# Altium PCB TouchButtons.PcbDoc
Units mm, origin at the board's own origin, x right, y up, seen from the top; angles counter-clockwise.
Board outline 160 x 30 mm, 2 copper layers (Component Side, Solder Side), stack 1.57 mm thick; 5 components, 6 nets, 15 pads, 0 vias.
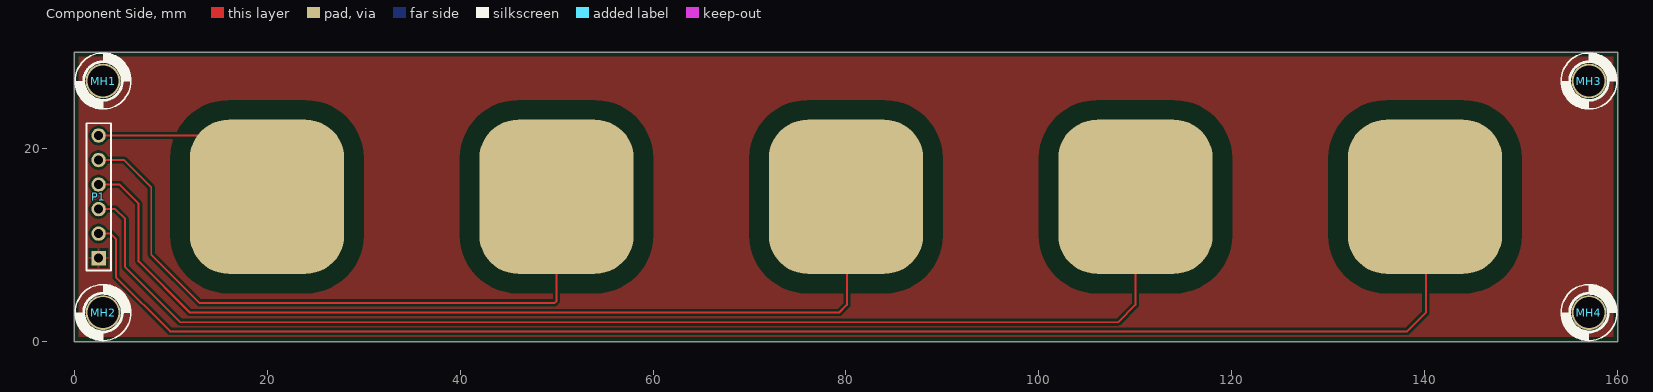
[diagram p0: Component Side view]
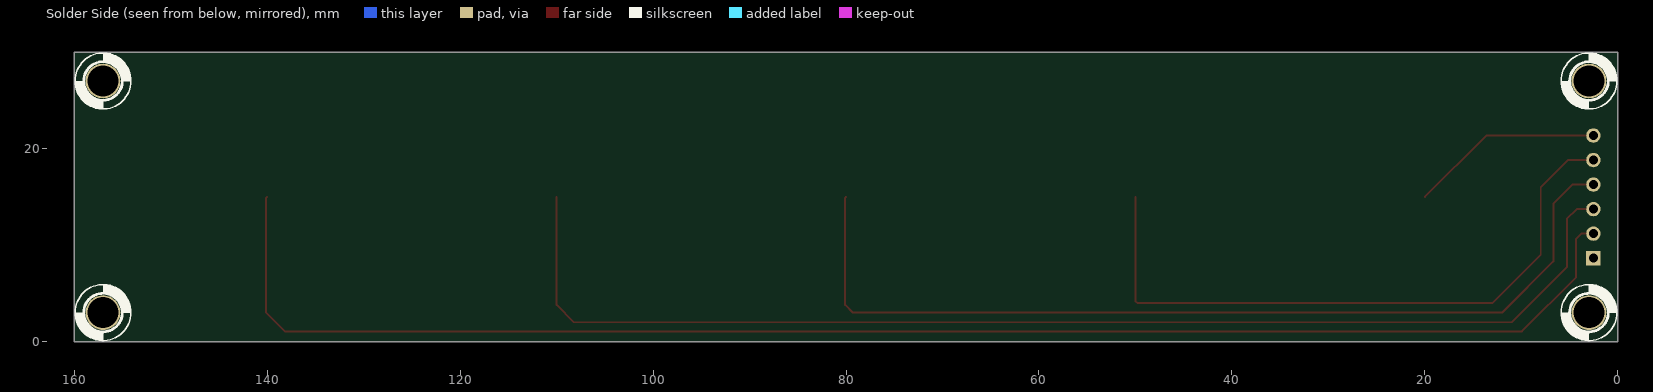
[diagram p1: Solder Side view, seen from below]

## Layer stack, top to bottom
Top Solder: solder mask 0.0102, Solder Resist, Dk 3.5
Component Side: signal copper 0.035
Dielectric 3: prepreg 1.5, Dk 4.2
Solder Side: signal copper 0.035
Bottom Solder: solder mask 0.0102, Solder Resist, Dk 3.5

## Board outline
0,0 0,30 160,30 160,0

## Design rules (kind name [scope] priority, off if disabled: settings)
AssemblyTestPointUsage [All] p1 off:
AssemblyTestpoint [All] p1 off: testpointundercomponent=TRUE minsize=1.016 maxsize=2.54 preferedsize=1.524 minholesize=0 maxholesize=1.016 preferedholesize=0.813 testpointgrid=0.025 usegrid=TRUE gridtolerance=0 allowsidetop=TRUE allowsidebottom=TRUE
BoardOutlineClearance [All] p1: gap=0.254 ignorepadtopadclearanceinfootprint=FALSE except(0.5: Poly-OutlineEdge)
Clearance [All] p1: gap=0.25 ignorepadtopadclearanceinfootprint=FALSE except(0.2: Arc-SMDPad Track-SMDPad SMDPad-SMDPad; 2: SMDPad-Fill SMDPad-Poly SMDPad-Region)
ComponentClearance [All] p1: gap=0.2 collisioncheckmode=3 verticalgap=0.25 showdistances=FALSE
DiffPairsRouting [All] p1: maxlimit=1 minlimit=0.254 mostfreqgap=0.254 toplayer_minwidth=0.2 toplayer_maxwidth=0.4 toplayer_prefwidth=0.254 bottomlayer_minwidth=0.2 bottomlayer_maxwidth=0.4 bottomlayer_prefwidth=0.254 maxuncoupledlength=12.7
FabricationTestPointUsage [All] p1 off: valid=0 allowmultiple=FALSE
FabricationTestpoint [All] p1 off: side=3 testpointundercomponent=TRUE minsize=1.016 maxsize=2.54 preferedsize=1.524 minholesize=0 maxholesize=1.016 preferedholesize=0.813 testpointgrid=0.025 allowsidetop=TRUE allowsidebottom=TRUE usegrid=TRUE gridtolerance=0
HoleSize [All] p1: absolutevalues=TRUE maxlimit=4 minlimit=0.025 maxpercent=80.000 minpercent=20.000
MinimumSolderMaskSliver [All] p1: minsoldermaskwidth=0
NetAntennae [All] p1 off: netantennaetolerance=0
PolygonConnect PolygonConnect_Via [All vs IsVia] p1: connectstyle=Direct reliefconductorwidth=0.254 reliefentries=4 polygonreliefangle="90 Angle" airgapwidth=0.254
PolygonConnect [All] p2: connectstyle=Relief reliefconductorwidth=0.254 reliefentries=4 polygonreliefangle="90 Angle" airgapwidth=0.254
RoutingVias [All] p1: holewidth=0.4 width=0.8 viastyle="Through Hole" minholewidth=0.35 minwidth=0.7 maxholewidth=1 maxwidth=1.5
SilkToSilkClearance [All] p1: silktosilkclearance=0.1
SilkToSolderMaskClearance SilkscreenOverComponentPads [IsPad] p1: minsilkscreentomaskgap=0 clearancetoexposedcopper=TRUE
SolderMaskExpansion [All] p1: expansion=0.102 istentingtop=FALSE
Width Width_1 [All] p1: maxlimit=3 minlimit=0.2 preferedwidth=0.254 minimp=50.000000 maximp=50.000000 favimp=50.000000
19 further rules are at their usual default settings.

## Components (designator, comment, footprint, x,y, rotation, side; value= is the part's Value field where it differs from the comment)
MH1 "Screw Hole" M3-Hole-2 3,27 r0 top
MH2 "Screw Hole" M3-Hole-2 3,3 r0 top
MH3 "Screw Hole" M3-Hole-2 157,27 r0 top
MH4 "Screw Hole" M3-Hole-2 157,3 r0 top
P1 "Header 6" HDR1X6-HEADER 2.54,8.65 r90 top

## Footprints (in the part's own frame and the unit in brackets; to place one, negate y for a bottom-side part, rotate by r counter-clockwise, add the part's x,y. Pads: shape width x height; smd on the part's side, far side on the other; paste and mask are expansions set on the pad)
HDR1X6-HEADER [mm]
  rect 1.5x1.5 hole 0.9: 1(0,0)
  round 1.5 hole 0.9: 2(2.54,0) 3(5.08,0) 4(7.62,0) 5(10.16,0) 6(12.7,0)
  silkscreen extent -1.27,-1.27 13.97,1.27, body extent -1.27,-1.27 13.97,1.27, height 8.6
M3-Hole-2 [mm]
  round 3.6 hole 3.2: M3(0,0)
  silkscreen extent -2.9,-2.93 2.9,2.93

## Part data
P1: library part "Header 1X6", "Header, 6-Pin", Manufacturer 1="Generic Header", Note="Approved sub OK"

## Free pads (board coordinates)
  rrect50% 16x16 smd: 1(20,15) 2(50,15) 3(80,15) 4(110,15) 5(140,15)

## Nets (pads, with @x,y where several pads share a name; then routed paths per layer and width w, separated by ;. In a path a pad name is that pad's centre, name@x,y a point inside that pad or via, vN(x,y) a via of type N, cw(c..) or ccw(c..) an arc to the next point about the centre after c; other vN are vias at no path point)
BTN_1: P1.6 pad.1 | length 20.1
  Component Side w0.2: P1.6 13.65,21.35 pad.1
BTN_2: P1.5 pad.2 | length 68.6
  Component Side w0.2: P1.5 5.19,18.81 8,16 8,9 12.997,4.003 49.803,4.003 50,4.2 pad.2
BTN_3: P1.4 pad.3 | length 98.1
  Component Side w0.2: P1.4 4.73,16.27 6.7,14.3 6.7,8.3 11.991,3.009 79.309,3.009 80.1,3.8 80.1,14.9 pad.3
BTN_4: P1.3 pad.4 | length 127.2
  Component Side w0.2: P1.3 4.27,13.73 5.3,12.7 5.3,7.7 11,2 108.2,2 110,3.8 pad.4
BTN_5: P1.2 pad.5 | length 156.9
  Component Side w0.2: P1.2 3.796,11.19 4.342,10.644 4.342,6.658 9.952,1.048 138.148,1.048 140.1,3 140.1,14.9 pad.5
GND: P1.1
pads on no net: MH1.M3 MH2.M3 MH3.M3 MH4.M3

## Polygon pours and split planes (outlines as drawn)
GND on Component Side "GND_L01_P000" (solid, pour order 0): 0,30 0,0 160,0 160,30

## Silkscreen, mask and mechanical layers (free items; w line width, h text height)
Mechanical 1:
  lines w0.2: 0,15 160,15
Mechanical 4:
  the board outline again, w0.2